# EAGLE board RC Kill Switch (EAGLE 5.11)
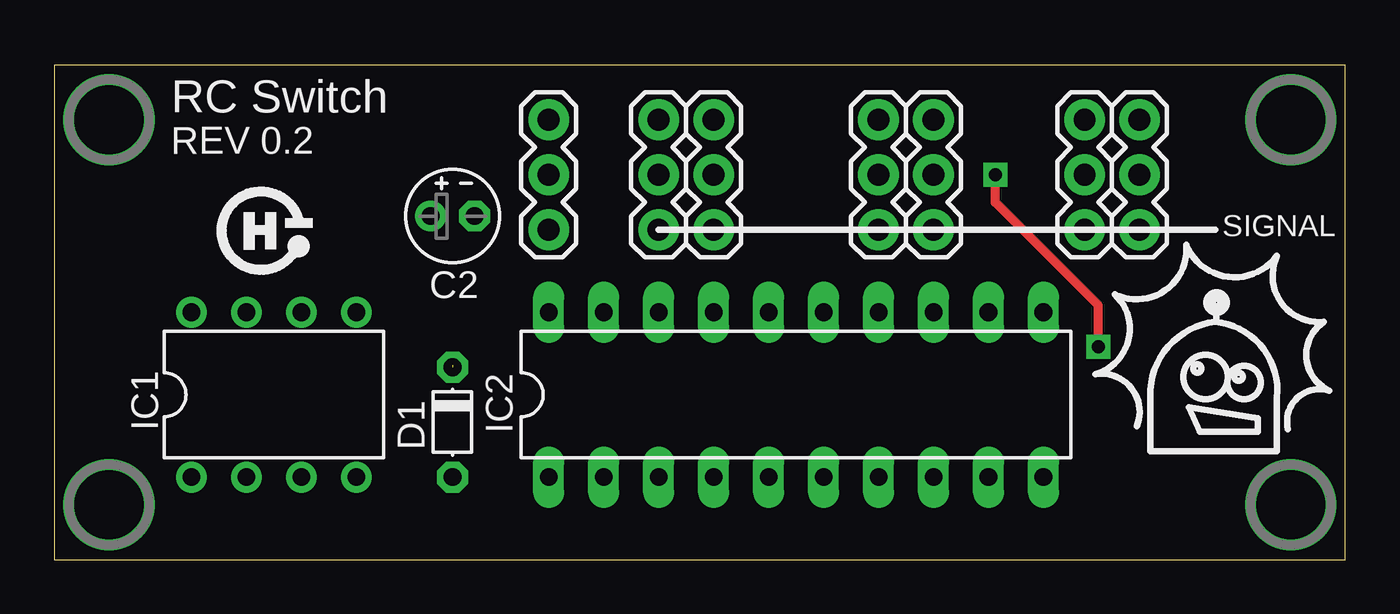
[diagram p0: board, top side]
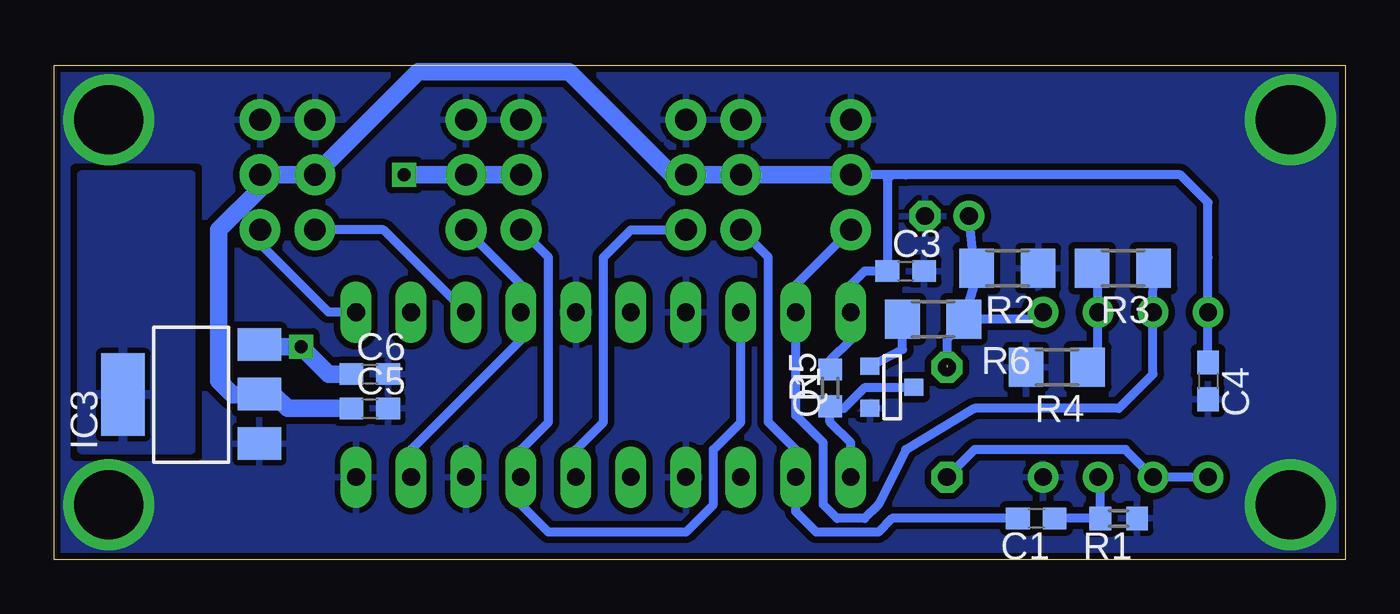
[diagram p1: board, bottom side, seen from below]

Size 59.68 x 22.85 mm. Coordinates in mm from the lower left corner, seen from the top.
Outline: 0,0 59.68,0 59.68,22.85 0,22.85 0,0
Copper layers (1*16): Top 0.035mm / dielectric 1.5mm / Bottom 0.035mm
Design rules "SparkFun": minimum track width 8mil, minimum drill 20mil, track to track 8mil, track to pad 8mil, pad to pad 8mil, via to via 8mil, smd to smd 8mil, copper to edge 10mil, drill to drill 8mil, minimum pad ring 12mil, minimum via ring 10mil, stop-mask expansion 4mil, vias tented up to drill 25mil, thermal gap 10mil

## Footprints (pad centres in the part's own frame; a part is rotated, then mirrored left to right if it is on the bottom)
C0603 = smd 1.1 x 1: 1 -0.85,0; 2 0.85,0
E2-4 = drill 0.813 pad 1.27 round: + -1.016,0 | drill 0.813 pad 1.27 octagon: - 1.016,0
D-5 = drill 0.813 octagon: A 2.54,0; C -2.54,0
DIL08 = drill 0.813 pad 1.27 round: 1 -3.81,-3.81; 2 -1.27,-3.81; 3 1.27,-3.81; 4 3.81,-3.81; 5 3.81,3.81; 6 1.27,3.81; 7 -1.27,3.81; 8 -3.81,3.81
DIL20 = drill 0.813 long: 1 -11.43,-3.81; 2 -8.89,-3.81; 3 -6.35,-3.81; 4 -3.81,-3.81; 5 -1.27,-3.81; 6 1.27,-3.81; 7 3.81,-3.81; 8 6.35,-3.81; 9 8.89,-3.81; 10 11.43,-3.81; 11 11.43,3.81; 12 8.89,3.81; 13 6.35,3.81; 14 3.81,3.81; 15 1.27,3.81; 16 -1.27,3.81; 17 -3.81,3.81; 18 -6.35,3.81; 19 -8.89,3.81; 20 -11.43,3.81
SOT223 = smd 1.499 x 2.007: 1 -2.261,-3.15; 2 0.025,-3.15; 3 2.311,-3.15 | smd 3.81 x 2.007: 4 0,3.15
1X03 = drill 1.016 pad 1.88 round: 1 0,0; 2 2.54,0; 3 5.08,0
SOT-23 = smd 0.787 x 0.889: 1 0.025,-1.016; 2 -0.94,1.016; 3 0.991,1.016
R0603 = smd 1 x 1.1: 1 -0.85,0; 2 0.85,0
R1206 = smd 1.6 x 1.803: 1 -1.422,0; 2 1.422,0

## Placement (x,y rotation side)
C1  0.22uF  [C0603]  14.29,1.91 180 bottom
C2  4.7uF  [E2-4]  18.41,15.88 0 top
C3  0.1uF  [C0603]  20.32,13.34 0 bottom
C4  0.1uF  [C0603]  6.35,8.26 270 bottom
C5  0.1uF  [C0603]  45.09,6.99 0 bottom
C6  0.33uF  [C0603]  45.09,8.57 0 bottom
D1  1N4148  [D-5]  18.41,6.35 270 top
IC1  LM1458N  [DIL08]  10.16,7.62 0 top
IC2  74HC244N  [DIL20]  34.29,7.62 0 top
IC3  REG1117  [SOT223]  53.34,7.62 90 bottom
JP1  MCU_STR  [1X03]  47.62,20.32 270 top
JP2  MCU_ESC  [1X03]  50.16,20.32 270 top
JP3  RX_STR  [1X03]  27.94,20.32 270 top
JP4  RX_ESC  [1X03]  30.48,20.32 270 top
JP5  SERVO  [1X03]  38.1,20.32 270 top
JP6  ESC  [1X03]  40.64,20.32 270 top
JP7  MCU  [1X03]  22.86,20.32 270 top
Q1  2N2222A  [SOT-23]  20.95,7.94 90 bottom
R1  10k  [R0603]  10.48,1.91 180 bottom
R2  10k  [R1206]  15.62,13.46 180 bottom
R3  100k  [R1206]  10.29,13.46 180 bottom
R4  4.7k  [R1206]  13.34,8.89 180 bottom
R5  10k  [R0603]  23.81,7.94 90 bottom
R6  27k  [R1206]  19.05,11.11 0 bottom
U$1  BOT-THOUGHTS  [BOT-THOUGHTS]  53.98,7.3 0 top
U$2  OSHW-LOGO  [OSHW-LOGO]  9.53,15.24 0 top

## Library data of the parts
C1-C6 R1-R6 = rcl
D1 = diode
IC1 = linear
IC2 = 74xx-us
IC3 = burr-brown
JP1-JP7 U$2 = SparkFun
Q1 U$1 = mes

## Nets
!MCU_EN: IC1.7 IC2.19 JP7.3 R3.1
!RC_EN: IC2.1 Q1.1 R5.1
+5V: C3.1 C4.1 C5.1 IC1.8 IC2.20 IC3.2 JP1.2 JP2.2 JP3.2 JP4.2 JP7.2 R5.2
ESC: IC2.9 IC2.14 JP6.3
GND: C2.- C3.2 C4.2 C5.2 C6.2 IC1.4 IC2.4 IC2.8 IC2.10 IC2.15 IC2.17 IC3.1 JP1.1 JP2.1 JP3.1 JP4.1 JP5.1 JP6.1 JP7.1 Q1.2 R1.1 R2.1 R4.2
HEATSINK: IC3.4
MCU_SPEED: IC2.13 JP1.3
MCU_STEER: IC2.11 JP2.3
N$1: D1.A IC1.1 IC1.2
N$2: C2.+ D1.C IC1.5 R2.2 R6.2
N$3: IC1.6 R3.2 R4.1
N$5: C1.1 IC1.3 R1.2
N$6: C6.1 IC3.3 JP5.2 JP6.2
N$8: Q1.3 R6.1
RX_ESC: IC2.6 JP4.3
RX_STEER: C1.2 IC2.2 JP3.3
SERVO: IC2.7 IC2.18 JP5.3

## Tracks (layer width: path | path; a pad name or v marks a point on that pad's centre or on a via)
!MCU_EN
  Bottom 0.406: R3.1 IC1.7 8.89,8.57 10.48,6.99 17.14,6.99 20.32,5.08 21.59,2.54 22.23,1.91 23.5,1.91 24.13,2.54 24.13,5.4 25.4,6.67 IC2.19 25.4,12.7 JP7.3
!RC_EN
  Bottom 0.406: Q1.1 22.2,7.96 23.18,6.99 23.71,6.99 R5.1 23.81,6.35 22.86,5.4 IC2.1
+5V
  Bottom 0.406: 20.95,17.78 20.32,17.78 7.62,17.78 6.35,16.51 6.35,13.97 IC1.8 6.35,11.11 6.35,9.53 C4.1 | 20.95,17.78 22.54,17.78 JP7.2 | JP1.2 46.99,17.78 | 50.83,7.64 IC3.2 50.16,7.62 49.53,7.62 | R5.2 23.81,9.21 22.86,10.16 22.86,11.01 IC2.20 22.86,12.7 22.23,13.34 C3.1 21.17,17.57 20.95,17.78
  Bottom 0.813: JP7.2 24.13,17.78 JP3.2 JP4.2 31.11,17.78 35.88,22.54 42.86,22.54 JP1.2 JP2.2 50.16,17.14 52.07,15.24 52.07,8.26 51.44,7.62 49.53,7.62 48.9,6.99 C5.1
ESC
  Bottom 0.406: JP6.3 38.1,12.7 IC2.14 38.1,10.16 43.18,5.08 IC2.9
GND  (via drill 3.2)
  Bottom 0.406: IC2.8 40.64,5.08
  other vias: 2.54,20.32 2.54,2.54 57.15,2.54 57.15,20.32
  pour Bottom (isolate 0.305, rank 2): 0,0 59.69,0 59.69,22.86 0,22.86
HEATSINK
  pour Bottom: 53.34,17.78 58.42,17.78 58.42,5.08 53.34,5.08
MCU_SPEED
  Bottom 0.406: IC2.13 44.45,15.24 JP1.3
MCU_STEER
  Bottom 0.406: JP2.3 50.16,14.61 46.99,11.43 IC2.11
N$1
  Bottom 0.406: IC1.1 IC1.2 10.16,5.08 17.14,5.08 D1.A
N$2  (1 unrouted)
  Bottom 0.406: 18.41,8.97 18.41,10.16 R6.2 | IC1.5 14.29,11.11 R6.2 | R6.2 17.14,12.7 R2.2 17.14,13.56 C2.+
N$3
  Bottom 0.305: R4.1 11.43,9.37
  Bottom 0.406: R3.2 11.43,13.16 IC1.6 11.43,9.37
N$5
  Bottom 0.406: IC1.3 11.33,3.71 R1.2 C1.1
N$6  (via drill 0.6)
  Top 0.406: v48.26,9.84 48.26,11.75 43.5,16.51 v43.5,17.78
  Bottom 0.813: JP5.2 JP6.2 v43.5,17.78 | IC3.3 50.1,9.84 v48.26,9.84 46.99,8.57 C6.1
N$8
  Bottom 0.406: R6.1 20.47,9.72 Q1.3
RX_ESC
  Bottom 0.406: JP4.3 33.02,15.24 34.29,13.97 34.29,6.35 35.56,5.08 IC2.6
RX_STEER
  Bottom 0.406: C1.2 20.95,1.91 21.59,1.27 24.45,1.27 25.4,2.22 IC2.2 25.4,5.08 26.67,6.35 26.67,13.97 JP3.3
SERVO
  Bottom 0.406: JP5.3 36.83,13.97 36.83,6.35 38.1,5.08 IC2.7 38.1,2.54 36.83,1.27 30.48,1.27 29.21,2.54 29.21,5.08 27.94,6.35 IC2.18

## Text on the board
tNames: RC Switch | REV 0.2 | SIGNAL
tValues: WWW.BOT-THOUGHTS.COM